# Altium PCB RS485_M_V1.PcbDoc
Units mm, origin at the board's own origin, x right, y up, seen from the top; angles counter-clockwise.
Board outline 13.93 x 19 mm, 2 copper layers (Top Layer, Bottom Layer); 12 components, 14 nets, 54 pads, 15 vias.
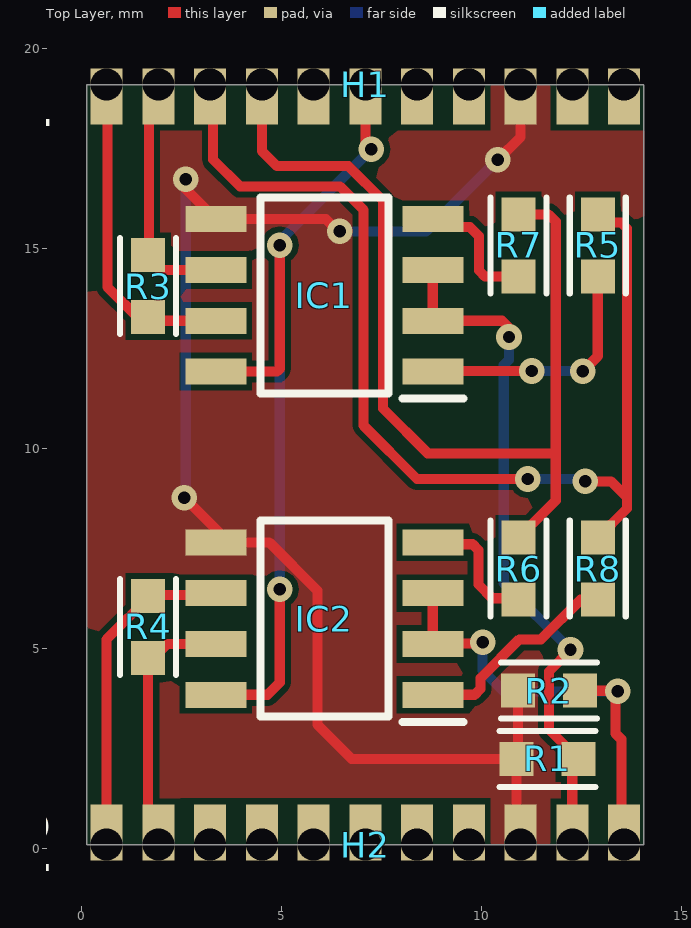
[diagram p0: Top Layer view]
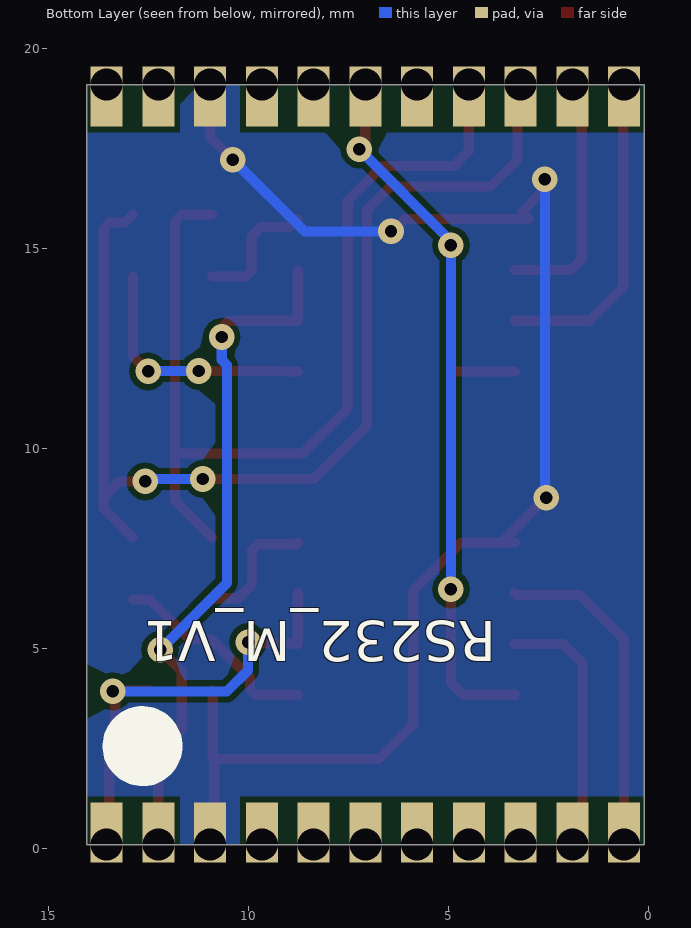
[diagram p1: Bottom Layer view, seen from below]
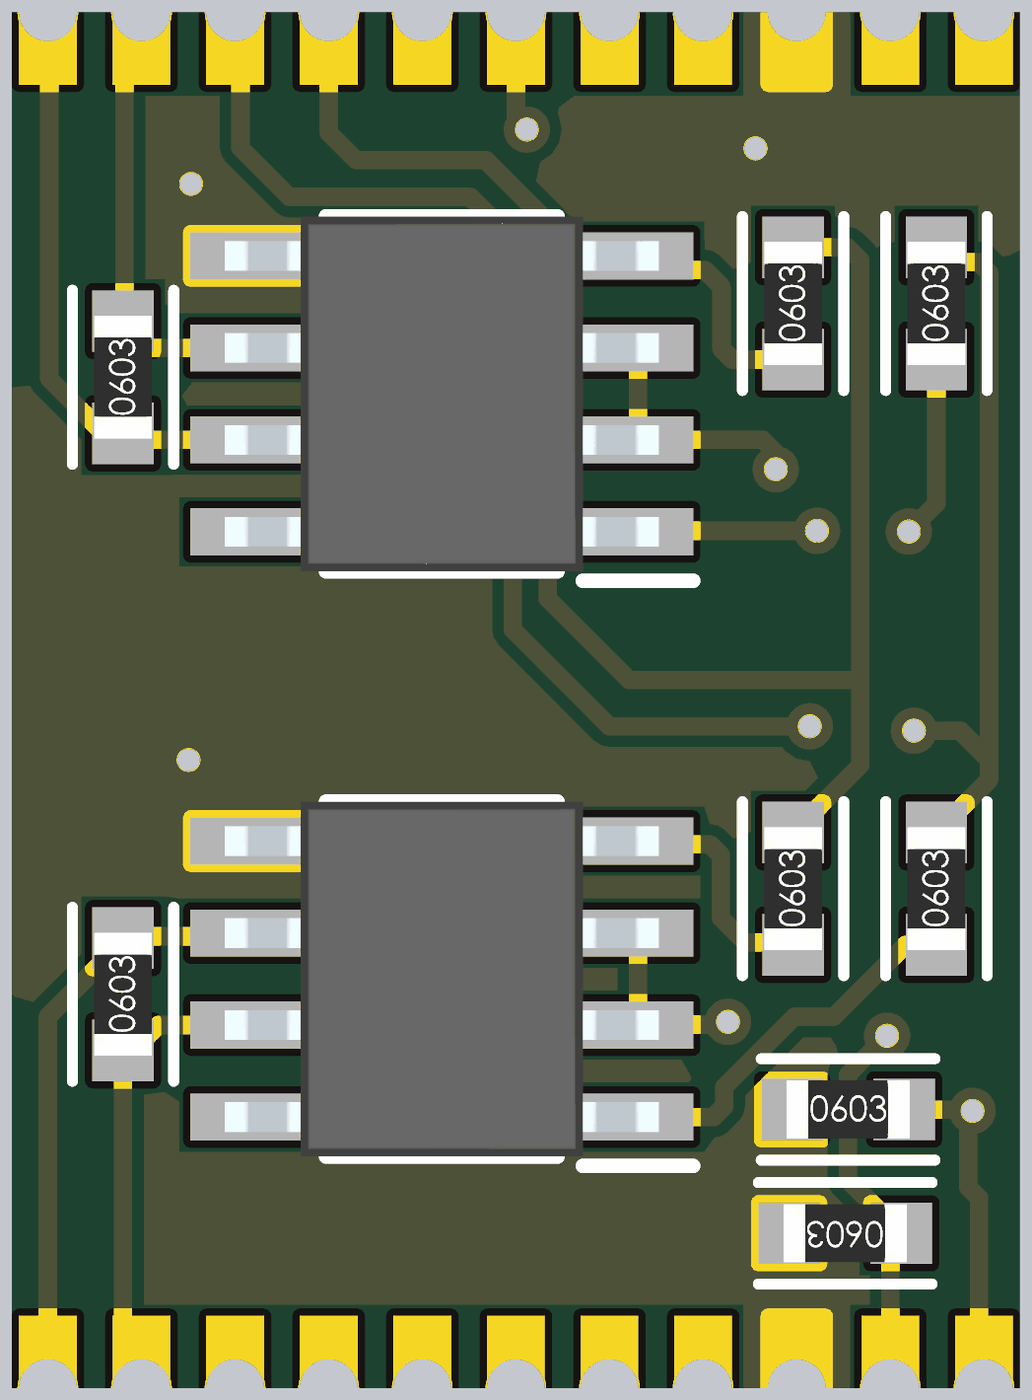
[diagram p2: 3D render of the assembled board from above, using the file's embedded part models]

## Layer stack, top to bottom
Top Solder: solder mask 0.0102, Solder Resist, Dk 3.5
Top Layer: signal copper 0.0356
Dielectric 1: dielectric 0.32, FR-4, Dk 4.8
Bottom Layer: signal copper 0.0356
Bottom Solder: solder mask 0.0102, Solder Resist, Dk 3.5

## Board outline
0.12,0.11 0.12,19.11 14.054,19.11 14.054,0.11

## Design rules (kind name [scope] priority, off if disabled: settings)
AssemblyTestPointUsage SilkToBoardRegionClearance_1 [All] p2:
AssemblyTestPointUsage SilkToBoardRegionClearance [All] p3:
Clearance [All] p1: gap=0.152 ignorepadtopadclearanceinfootprint=FALSE except(0: Arc-Hole Track-Hole SMDPad-Hole THPad-Hole Via-Hole Fill-Hole Poly-Hole Region-Hole Text-Hole)
HoleSize [All] p1: absolutevalues=TRUE maxlimit=6.35 minlimit=0.3 maxpercent=80.000 minpercent=20.000
MatchedLengths DiffPair_DIFF100MatchedLengths [InDifferentialPairClass('DIFF100')] p1: tolerance=0.152 checknetsindiffpair=TRUE checkdiffpairvsdiffpair=FALSE checkxsignals=FALSE checkothers=FALSE usedelayunits=FALSE
MinimumSolderMaskSliver [All] p1: minsoldermaskwidth=0.1
MinimumSolderMaskSliver SilkscreenOverComponentPads_2 [All] p2: minsoldermaskwidth=0.254
MinimumSolderMaskSliver SilkToSolderMaskClearance_1 [IsPad] p3: minsoldermaskwidth=0.254
MinimumSolderMaskSliver SilkscreenOverComponentPads_1 [All] p4: minsoldermaskwidth=0.254
MinimumSolderMaskSliver SilkToSolderMaskClearance [IsPad] p5: minsoldermaskwidth=0.254
MinimumSolderMaskSliver SilkscreenOverComponentPads [All] p6: minsoldermaskwidth=0.254
PolygonConnect [All] p1: connectstyle=Direct reliefconductorwidth=0.254 reliefentries=4 polygonreliefangle="90 Angle" airgapwidth=0.254
RoomDefinition RS485_M_V1 [InComponentClass('RS485_M_V1')] p1: confinementstyle=ConfineIn formatcopy=TRUE lockcomponents=FALSE outline -0.01,-0.52 14.24,-0.52 14.24,19.7 -0.01,19.7
RoutingVias [All] p1: holewidth=0.305 width=0.635 viastyle="Through Hole" minholewidth=0.305 minwidth=0.635 maxholewidth=0.711 maxwidth=1.27
SilkToBoardRegionClearance SilkToBoardRegionClearance_2 [All] p1:
SilkToSolderMaskClearance SilkToSolderMaskClearance_2 [IsPad] p1: minsilkscreentomaskgap=0.254 clearancetoexposedcopper=TRUE
SolderMaskExpansion [All] p1: expansion=0.102
Width [All] p1: maxlimit=2.54 minlimit=0.152 preferedwidth=0.254
26 further rules are at their usual default settings.

## Components (designator, comment, footprint, x,y, rotation, side; value= is the part's Value field where it differs from the comment)
H1 "CASTELLATED 11 pin" "CASTELLATED 11 pin" 13.558,19.11 r180 top locked
H2 "CASTELLATED 11 pin" "CASTELLATED 11 pin" 0.62,0.11 r0 top locked
IC1 "ST3485EBDR" SOIC127P600X175-8N 6.065,13.84 r180 top
IC2 "ST3485EBDR" SOIC127P600X175-8N 6.065,5.76 r180 top
R1 "10k" SMD-0603-RES 11.64,2.25 r90 top
R2 "10k" SMD-0603-RES 11.68,3.96 r270 top
R3 "120" SMD-0603-RES 1.66,14.07 r0 top
R4 "120" SMD-0603-RES 1.66,5.55 r0 top
R5 "33" SMD-0603-RES 12.9,15.088 r0 top
R6 "33" SMD-0603-RES 10.92,7.008 r0 top
R7 "33" SMD-0603-RES 10.92,15.088 r0 top
R8 "33" SMD-0603-RES 12.9,7.008 r0 top

## Footprints (in the part's own frame and the unit in brackets; to place one, negate y for a bottom-side part, rotate by r counter-clockwise, add the part's x,y. Pads: shape width x height; smd on the part's side, far side on the other; paste and mask are expansions set on the pad)
"CASTELLATED 11 pin" [mm]
  rect 0.8x1.4 / inner rect 0.8x1.5 / far side rect 0.8x1.5 hole 0.8 copper offset 0,0.3: 1(0,0) 2(1.294,0) 3(2.587,0) 4(3.881,0) 5(5.175,0) 6(6.469,0) 7(7.762,0) 8(9.056,0) 9(10.35,0) 10(11.644,0) 11(12.938,0)
SMD-0603-RES [mm]
  rect 0.85x0.85 smd: 1(0,0.775) 2(0,-0.775)
  silkscreen extent -0.7,-1.2 0.7,1.2, body extent -0.4,-0.85 0.4,0.85, height 0.56
SOIC127P600X175-8N [mm]
  rect 1.525x0.65 smd: 1(-2.712,1.905) 2(-2.712,0.635) 3(-2.712,-0.635) 4(-2.712,-1.905) 5(2.712,-1.905) 6(2.712,-0.635) 7(2.712,0.635) 8(2.712,1.905)
  silkscreen extent -3.47,-2.45 1.6,2.58, body extent -3,-2.45 3,2.45, height 1.75

## Part data
IC1 IC2: "Integrated Circuit", Manufacturer_Name=STMicroelectronics, Mouser2 Part Number=511-ST3485EBDR, Datasheet Link=https://componentsearchengine.com/Datasheets/1/ST3485EBDR.pdf, Height=1.75mm, Manufacturer_Part_Number=ST3485EBDR, Mouser2 Price/Stock=https://www.mouser.com/Search/Refine.aspx?Keyword=511-ST3485EBDR, Supplier 1=Mouser, Supplier Part Number 1=511-ST3485EBDR
R1 R2: library part ERJ-3EKF1002V, "RES SMD 10K OHM 1% 1/10W 0603", Digi-Key Part Number=P10.0KHCT-ND, Manufacturer="Panasonic Electronic Components", Operating Temperature="-55°C ~ 155°C", Package / Case="0603 (1608 Metric)", Power (Watts)="0.1W, 1/10W", Supplier Device Package=0603, Supplier Part Number 1=667-ERJ-3EKF1002V, Temperature Coefficient=±100ppm/°C, Tolerance=±1%, @ qty=1500, Composition="Thick Film", Datasheets=http://industrial.panasonic.com/www-cgi/jvcr13pz.cgi?E+PZ+3+AOA0002+ERJ3EKF1002V+7+WW, Factory Stock=0, Failure Rate=-, Features="Automotive AEC-Q200", Height - Seated (Max)="0.022\" (0.55mm)", Image=//media.digikey.com/Photos/Panasonic%20Photos/MFG_ERJ-P6W%20Series.jpg, Minimum Quantity=1, Number of Terminations=2, Packaging="Cut Tape (CT)", Part Number=ERJ-3EKF1002V, Part Status=Active, Quantity Available=6703141, Series=ERJ, Size / Dimension="0.063\" L x 0.031\" W (1.60mm x 0.80mm)", Supplier 1=Mouser, Unit Price (USD)=0.00379
R3 R4: library part ERJ-3EKF1200V, "RES SMD 120 OHM 1% 1/10W 0603", Digi-Key Part Number=P120HCT-ND, Manufacturer="Panasonic Electronic Components", Operating Temperature="-55°C ~ 155°C", Package / Case="0603 (1608 Metric)", Power (Watts)="0.1W, 1/10W", Supplier Device Package=0603, Supplier Part Number 1=667-ERJ-3EKF1200V, Temperature Coefficient=±100ppm/°C, Tolerance=±1%, @ qty=1500, Composition="Thick Film", Datasheets=http://industrial.panasonic.com/www-cgi/jvcr13pz.cgi?E+PZ+3+AOA0002+ERJ3EKF1200V+7+WW, Factory Stock=0, Failure Rate=-, Features="Automotive AEC-Q200", Height - Seated (Max)="0.022\" (0.55mm)", Image=//media.digikey.com/Photos/Panasonic%20Photos/MFG_ERJ-P6W%20Series.jpg, Minimum Quantity=1, Number of Terminations=2, Packaging="Cut Tape (CT)", Part Number=ERJ-3EKF1200V, Part Status=Active, Quantity Available=84623, Series=ERJ, Size / Dimension="0.063\" L x 0.031\" W (1.60mm x 0.80mm)", Supplier 1=Mouser, Unit Price (USD)=0.00379
R5 R6 R7 R8: library part ERJ-3EKF33R0V, "RES SMD 33 OHM 1% 1/10W 0603", Digi-Key Part Number=P33.0HCT-ND, Manufacturer="Panasonic Electronic Components", Operating Temperature="-55°C ~ 155°C", Package / Case="0603 (1608 Metric)", Power (Watts)="0.1W, 1/10W", Supplier Device Package=0603, Supplier Part Number 1=667-ERJ-3EKF33R0V, Temperature Coefficient=±100ppm/°C, Tolerance=±1%, @ qty=1500, Composition="Thick Film", Datasheets=http://industrial.panasonic.com/www-cgi/jvcr13pz.cgi?E+PZ+3+AOA0002+ERJ3EKF33R0V+7+WW, Factory Stock=0, Failure Rate=-, Features="Automotive AEC-Q200", Height - Seated (Max)="0.022\" (0.55mm)", Image=//media.digikey.com/Photos/Panasonic%20Photos/MFG_ERJ-P6W%20Series.jpg, Minimum Quantity=1, Number of Terminations=2, Packaging="Cut Tape (CT)", Part Number=ERJ-3EKF33R0V, Part Status=Active, Quantity Available=1306721, Series=ERJ, Size / Dimension="0.063\" L x 0.031\" W (1.60mm x 0.80mm)", Supplier 1=Mouser, Unit Price (USD)=0.00379

## Via types
v1: diameter 0.64, hole 0.31, Top Layer to Bottom Layer, tented both sides, 15 vias

## Nets (pads, with @x,y where several pads share a name; then routed paths per layer and width w, separated by ;. In a path a pad name is that pad's centre, name@x,y a point inside that pad or via, vN(x,y) a via of type N, cw(c..) or ccw(c..) an arc to the next point about the centre after c; other vN are vias at no path point)
A1: H1.10 IC1.6 R3.1 | length 6.2
  Top Layer w0.254: H1.10 1.68,18.876 1.68,14.74 1.945,14.475 IC1.6
A2: H2.1 IC2.6 R4.1 | length 8.3
  Top Layer w0.254: H2.1 0.62,5.24 1.73,6.35 3.308,6.35 IC2.6
B1: H1.11 IC1.7 R3.2 | length 8.1
  Top Layer w0.254: H1.11 0.64,19.09 0.64,14.05 1.485,13.205 IC1.7
B2: H2.2 IC2.7 R4.2 | length 6.5
  Top Layer w0.254: H2.2 1.66,0.364 1.66,4.64 2.145,5.125 IC2.7
D1: H1.8 R6.1 R7.1 | length 24.5
  Top Layer w0.254: H1.8 4.502,17.448 4.88,17.07 6.67,17.07 7.53,16.21 7.53,11.01 8.65,9.89 11.849,9.89 ; R6.1 11.849,8.712 11.849,9.89 ; R7.1 11.671,15.863 11.849,15.685 11.849,9.89
D2: H1.9 R5.1 R8.1 | length 27.8
  Top Layer w0.254: H1.9 3.282,19.036 3.282,17.238 3.96,16.56 6.46,16.56 7.046,15.974 7.046,10.584 8.38,9.25 v1(11.15,9.25) ; v1(12.59,9.19) 13.23,9.19 13.63,8.79 ; R8.1 13.63,8.513 13.63,8.79 ; R5.1 13.103,15.66 13.481,15.66 13.63,15.511 13.63,8.79
  Bottom Layer w0.254: v1(11.15,9.25) 12.53,9.25 v1(12.59,9.19)
D5: H2.10 IC1.2 IC1.3 R1.2 | length 17.5
  Top Layer w0.254: IC1.3 IC1.2 10.505,13.205 10.68,13.03 v1(10.68,12.8) ; v1(12.219,4.977) 11.68,4.438 11.68,2.985 R1.2 12.264,2.099 H2.10
  Bottom Layer w0.254: v1(10.68,12.8) 10.68,12.228 10.551,12.098 10.551,6.646 v1(12.219,4.977)
D6: H2.11 IC2.2 IC2.3 R2.1 | length 11.7
  Top Layer w0.254: IC2.3 IC2.2 8.784,5.132 10.042,5.132 10.02,5.155 v1(10.02,5.17) ; R2.1 12.46,3.955 13.336,3.955 13.341,3.96 13.341,2.89 13.49,2.741 13.49,0.178 H2.11
  Bottom Layer w0.254: v1(10.02,5.17) 10.02,4.469 10.549,3.94 v1(13.4,3.94)
GND: H1.3 H2.9 IC1.5 IC2.5 R1.1 R2.2 | length 36.8
  Top Layer w0.254: v1(2.565,8.785) 3.58,7.77 IC2.5@3.58,7.665 ; v1(2.6,16.74) 2.6,16.498 3.173,15.925 2.993,15.745 IC1.5 6.105,15.745 6.41,15.44 v1(6.446,15.44) ; IC2.5 IC2.5@3.58,7.665 ; v1(10.4,17.23) 10.971,17.801 H1.3 ; R2.2 10.905,2.29 R1.1 ; H2.9 10.865,0.215 R1.1 ; IC2.5@3.58,7.665 4.685,7.665 5.89,6.46 5.89,3.11 6.75,2.25 R1.1
  Bottom Layer w0.254: v1(2.565,8.785) 2.6,8.82 v1(2.6,16.74) ; v1(6.446,15.44) 8.61,15.44 v1(10.4,17.23)
NetIC1_1: IC1.1 R5.2 | length 6.3
  Top Layer w0.254: IC1.1 9.095,11.935 9.11,11.95 v1(11.25,11.95) ; v1(12.52,11.94) 12.9,12.32 R5.2
  Bottom Layer w0.254: v1(11.25,11.95) 12.51,11.95 v1(12.52,11.94)
NetIC1_4: IC1.4 R7.2 | length 3.2
  Top Layer w0.254: IC1.4 8.971,15.55 9.7,15.55 9.93,15.32 9.93,14.462 10.079,14.313 R7.2
NetIC2_1: IC2.1 R8.2 | length 5.3
  Top Layer w0.254: IC2.1 9.821,3.855 9.97,4.004 9.97,4.27 10.941,5.241 11.481,5.241 12.473,6.233 R8.2
NetIC2_4: IC2.4 R6.2 | length 3.2
  Top Layer w0.254: IC2.4 8.823,7.619 9.771,7.619 9.92,7.47 9.92,6.61 10.263,6.267 10.886,6.267 R6.2
VCC2: H1.6 IC1.8 IC2.8 | length 22.4
  Top Layer w0.254: IC2.8 4.645,3.855 4.95,4.16 v1(4.95,6.49) ; IC1.8 4.885,11.935 4.95,12 v1(4.95,15.09) ; H1.6 7.09,17.641 v1(7.24,17.49)
  Bottom Layer w0.254: v1(4.95,6.49) v1(4.95,15.09) 4.95,15.2 v1(7.24,17.49)
pads on no net: H1.1 H1.2 H1.4 H1.5 H1.7 H2.3 H2.4 H2.5 H2.6 H2.7 H2.8

## Polygon pours and split planes (outlines as drawn)
GND on Bottom Layer "GND_L02_P006" (solid, pour order 6): 0.12,19.11 0.12,0.11 14.06,0.11 14.06,19.12 14.05,19.12
no net on Bottom Layer "NONET_L02_P000" (solid, pour order 0): 0.374,18.271
GND on Top Layer "GND_L01_P008" (solid, pour order 8): 0.12,19.1 0.13,19.11 14.06,19.11 14.06,0.11 0.12,0.11

## Silkscreen, mask and mechanical layers (free items; w line width, h text height)
Bottom Overlay:
  circle w1: c12.66,2.57 r0.5
  text "RS232_M_V1" at 3.82,5.69 h1 r180
Mechanical 1:
  pour cut-out: 5.459,12.118
  lines w0.2: 14.054,0.11 14.054,19.11 ; 14.054,0.11 0.12,0.11 0.12,19.11 14.054,19.11